# Altium PCB Dentist_camera_extender_board_pcb_2.PcbDoc
Units mm, origin at the board's own origin, x right, y up, seen from the top; angles counter-clockwise.
Board outline 33.51 x 24 mm, 2 copper layers (Top Layer, Bottom Layer); 3 components, 32 nets, 59 pads, 12 vias.
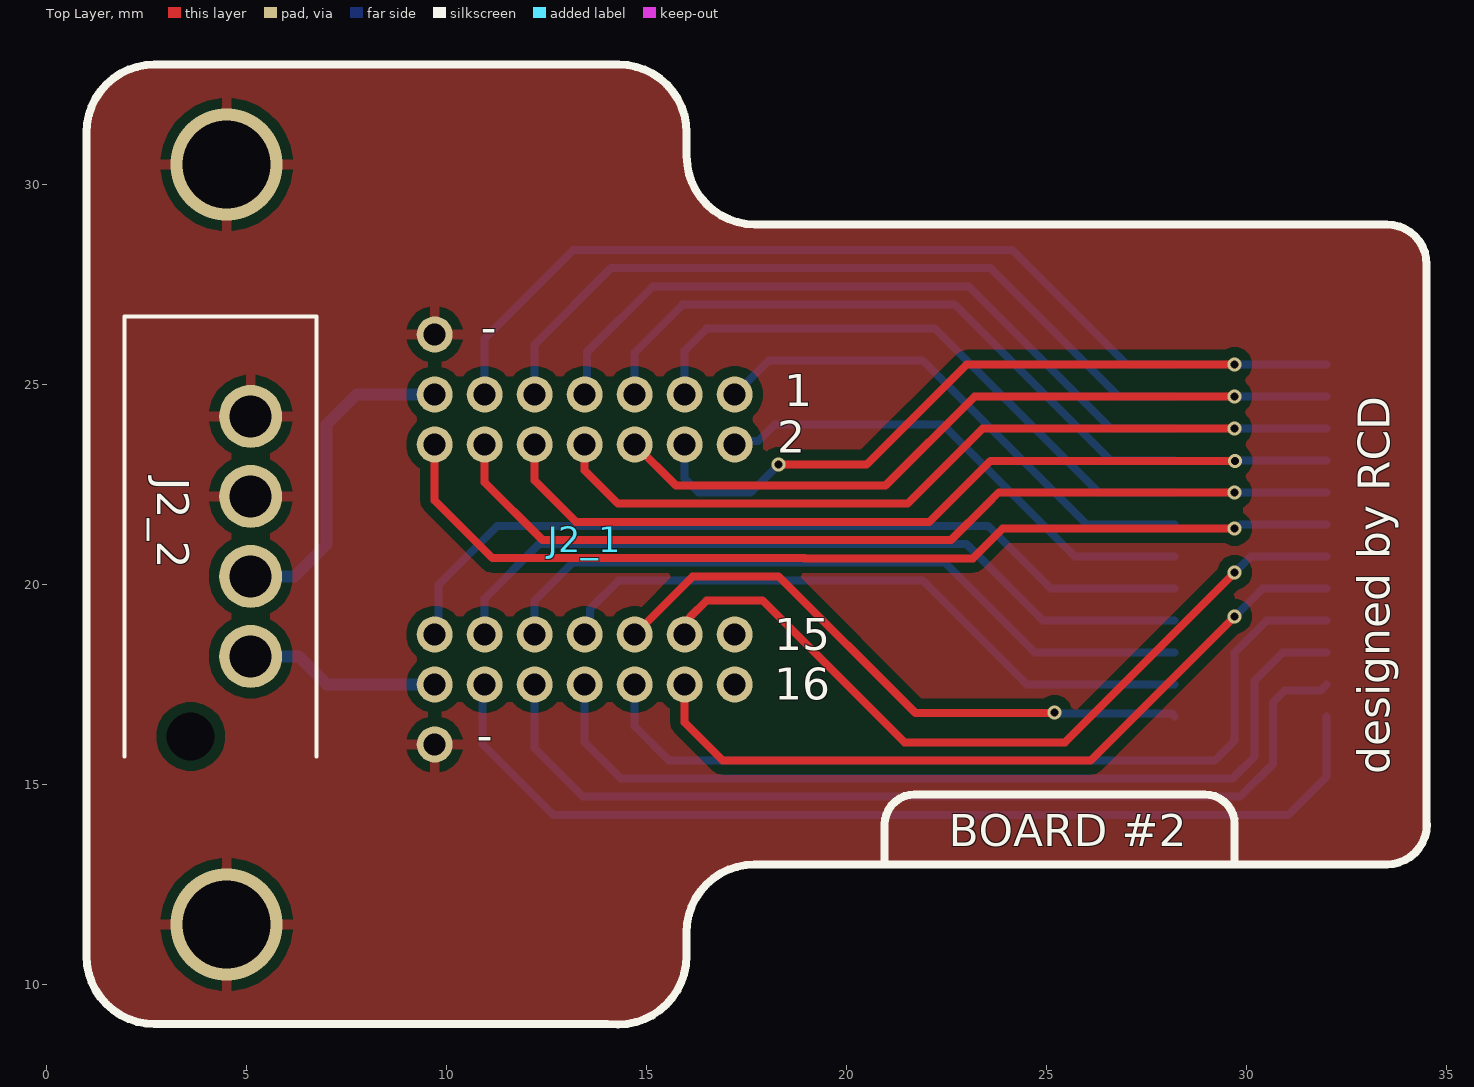
[diagram p0: Top Layer view]
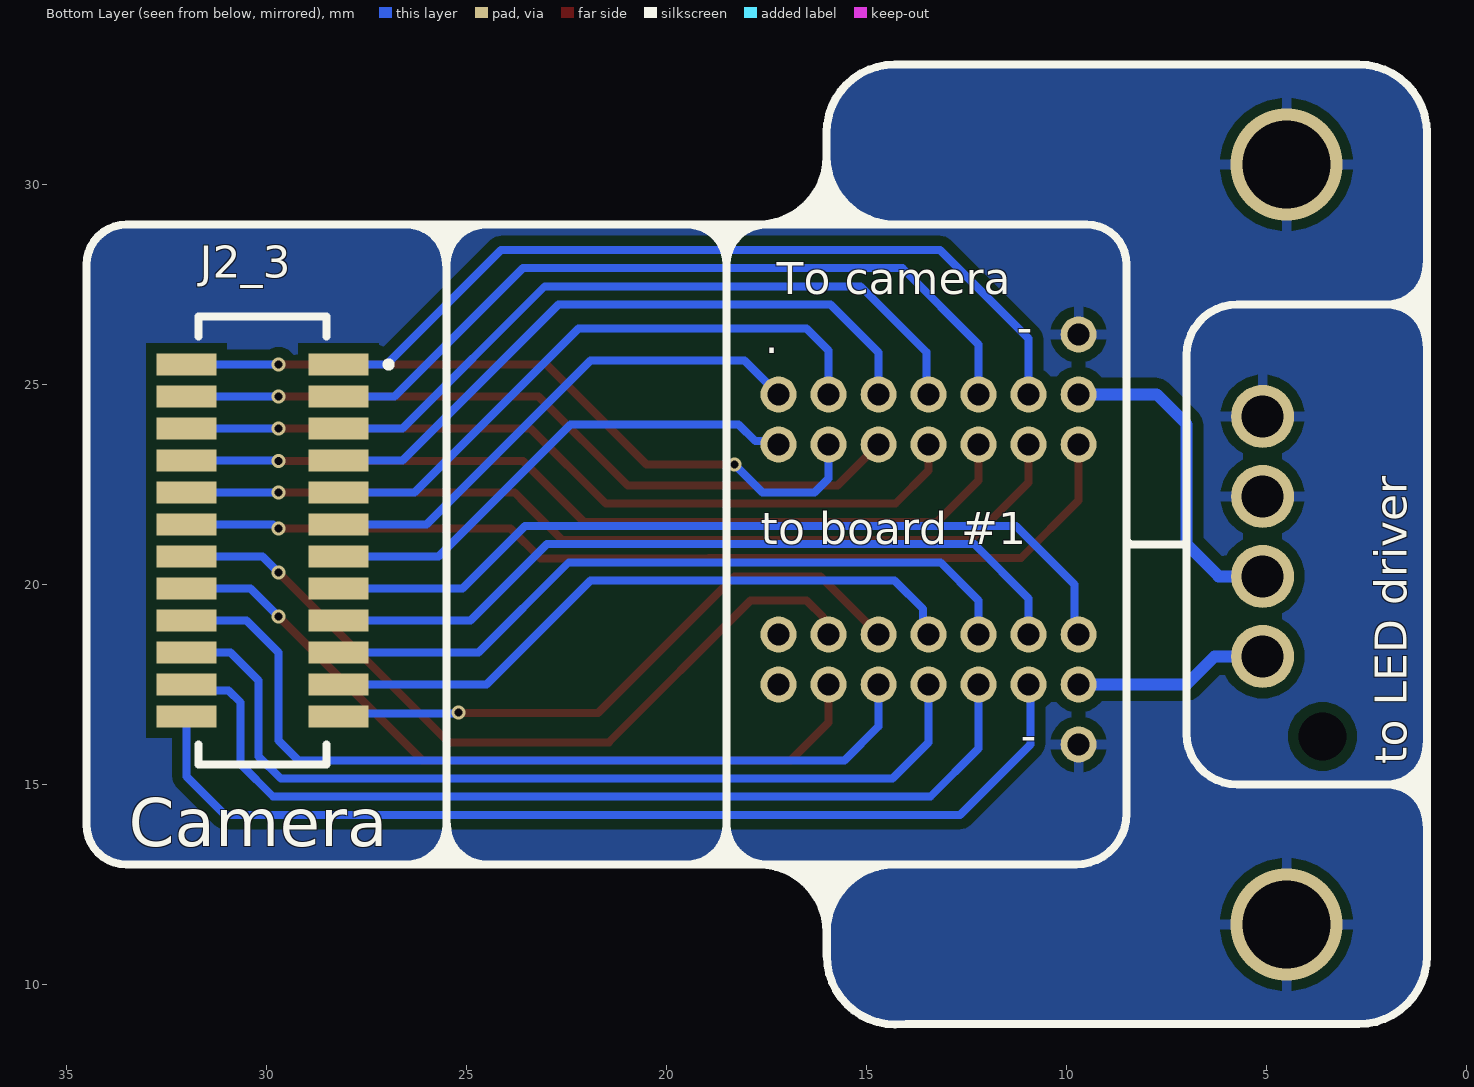
[diagram p1: Bottom Layer view, seen from below]

## Layer stack, top to bottom
Top Solder: solder mask 0.0102, Solder Resist, Dk 3.5
Top Layer: signal copper 0.0356
Dielectric 1: dielectric 0.32, FR-4, Dk 4.8
Bottom Layer: signal copper 0.0356
Bottom Solder: solder mask 0.0102, Solder Resist, Dk 3.5

## Board outline
2.7,9.007 14.002,9.007 cw(c14.002,9.005) 14.004,9.005 14.286,9 ccw(c14.286,10.707) 15.493,9.5 ccw(c14.286,10.707) 15.993,10.707 15.993,11.293 cw(c17.7,11.293) 16.493,12.5 cw(c17.7,11.293) 17.7,13 18.5,13 25.5,13 33.5,13 33.504,13.001 ccw(c33.504,14.001) 34.504,14.001 34.5,13.908 34.5,28.003 34.5,28 ccw(c33.5,28) 33.5,29 17.707,29 cw(c17.707,30.707) 16.5,29.5 cw(c17.707,30.707) 16,30.707 16,31.293 ccw(c14.293,31.293) 15.5,32.5 ccw(c14.293,31.293) 14.293,33 2.7,33 ccw(c2.7,31.293) 1.493,32.5 ccw(c2.7,31.293) 0.993,31.293 0.993,10.714 ccw(c2.7,10.714) 1.493,9.507 ccw(c2.7,10.714)

## Design rules (kind name [scope] priority, off if disabled: settings)
Clearance [All] p1: gap=0.254 ignorepadtopadclearanceinfootprint=FALSE except(0: Arc-Hole Track-Hole SMDPad-Hole THPad-Hole Via-Hole Fill-Hole Poly-Hole Region-Hole Text-Hole; 0.2: Arc-SMDPad Track-SMDPad SMDPad-SMDPad)
PolygonConnect [All] p1: connectstyle=Relief reliefconductorwidth=0.254 reliefentries=4 polygonreliefangle="90 Angle" airgapwidth=0.254
RoutingVias [All] p1: holewidth=0.2 width=0.35 viastyle="Through Hole" minholewidth=0.2 minwidth=0.35 maxholewidth=0.711 maxwidth=1.27
SolderMaskExpansion [All] p1: expansion=0.102 istentingtop=FALSE
Width [All] p1: maxlimit=2 minlimit=0.2 preferedwidth=0.2 minimp=50.000000 maximp=50.000000 favimp=50.000000
30 further rules are at their usual default settings.

## Components (designator, comment, footprint, x,y, rotation, side; value= is the part's Value field where it differs from the comment)
J2_1 "30 pin connector" 30_PIN_CONNECTOR 9.7,16 r0 top locked
J2_2 "B04B-JWPF-SK-R_LF__SN_" B04BJWPFSKRLFSN 5.1,18.2 r90 top
J2_3 "52465-2471" 524652471 30.1,21.1 r90 bottom locked

## Footprints (in the part's own frame and the unit in brackets; to place one, negate y for a bottom-side part, rotate by r counter-clockwise, add the part's x,y. Pads: shape width x height; smd on the part's side, far side on the other; paste and mask are expansions set on the pad)
30_PIN_CONNECTOR [mm]
  round 0.9 hole 0.55: 1(7.5,8.75) 2(7.5,7.5) 3(6.25,8.75) 4(6.25,7.5) 5(5,8.75) 6(5,7.5) 7(3.75,8.75) 8(3.75,7.5) 9(2.5,8.75) 10(2.5,7.5) 11(1.25,8.75) 12(1.25,7.5) 13(0,8.75) 14(0,7.5) 15(7.5,2.75) 16(7.5,1.5) 17(6.25,2.75) 18(6.25,1.5) 19(5,2.75) 20(5,1.5) 21(3.75,2.75) 22(3.75,1.5) 23(2.5,2.75) 24(2.5,1.5) 25(1.25,2.75) 26(1.25,1.5) 27(0,2.75) 28(0,1.5) 29(0,10.25) 30(0,0)
524652471 [mm]
  rect 0.55x1.5 smd: 1(4.4,-1.9) 2(3.6,-1.9) 3(2.8,-1.9) 4(2,-1.9) 5(1.2,-1.9) 6(0.4,-1.9) 7(-0.4,-1.9) 8(-1.2,-1.9) 9(-2,-1.9) 10(-2.8,-1.9) 11(-3.6,-1.9) 12(-4.4,-1.9) 13(4.4,1.9) 14(3.6,1.9) 15(2.8,1.9) 16(2,1.9) 17(1.2,1.9) 18(0.4,1.9) 19(-0.4,1.9) 20(-1.2,1.9) 21(-2,1.9) 22(-2.8,1.9) 23(-3.6,1.9) 24(-4.4,1.9)
  silkscreen extent -5.6,-3.2 5.6,1.6, body extent -5.61,-2.1 5.59,2.1, height 3.56
B04BJWPFSKRLFSN [mm]
  round 1.575 hole 1.05: 1(0,0) 2(2,0) 3(4,0) 4(6,0)
  round 0.6 hole 1.2 unplated: MH1(-2,1.5)
  silkscreen extent -2.5,-1.65 8.5,3.15, body extent -2.5,-1.65 8.5,3.15, height 16.7

## Part data
J2_2: "Connector", Manufacturer_Name="JST (JAPAN SOLDERLESS TERMINALS)", Manufacturer_Part_Number=B04B-JWPF-SK-R(LF)(SN), Datasheet Link=https://componentsearchengine.com/Datasheets/2/B04B-JWPF-SK-R(LF)(SN).pdf, Height=16.6mm
J2_3: "Connector", Manufacturer_Name=Molex, Mouser Part Number=538-52465-2471, Datasheet Link=https://www.molex.com/pdm_docs/sd/524652471_sd.pdf, Height=3.75mm, Manufacturer_Part_Number=52465-2471, Mouser Price/Stock=https://www.mouser.co.uk/ProductDetail/Molex/52465-2471?qs=oPDuosDifXEuWhdL4yjOXg%3D%3D

## Via types
v1: diameter 0.35, hole 0.2, Top Layer to Bottom Layer, tented both sides, 10 vias
v2: diameter 2.8, hole 2.2, Top Layer to Bottom Layer, 2 vias

## Nets (pads, with @x,y where several pads share a name; then routed paths per layer and width w, separated by ;. In a path a pad name is that pad's centre, name@x,y a point inside that pad or via, vN(x,y) a via of type N, cw(c..) or ccw(c..) an arc to the next point about the centre after c; other vN are vias at no path point)
GND: J2_1.29 J2_1.30 J2_2.3 J2_2.4
  other v2: 4.5,11.5 4.5,30.5
GND_SDI: 
NetD1_1: 
NetD2_1: 
NetJ1_1: J2_1.4 J2_3.13 | length 18.4
  Top Layer w0.2: v1(18.3,23) 20.5,23 23,25.5 v1(29.7,25.5)
  Bottom Layer w0.2: J2_1.4 15.95,22.65 16.3,22.3 17.6,22.3 v1(18.3,23) ; v1(29.7,25.5) J2_3.13
NetJ1_2: J2_1.11 J2_3.1 | length 20.8
  Bottom Layer w0.2: J2_1.11 10.95,26.15 13.162,28.362 24.138,28.362 27,25.5 J2_3.1
NetJ1_3: J2_1.6 J2_3.14 | length 18.6
  Top Layer w0.2: J2_1.6 15.729,22.471 20.971,22.471 23.2,24.7 v1(29.7,24.7)
  Bottom Layer w0.2: v1(29.7,24.7) J2_3.14
NetJ1_4: J2_1.9 J2_3.2 | length 19.4
  Bottom Layer w0.2: J2_1.9 12.2,26 14.108,27.908 23.592,27.908 26.8,24.7 J2_3.2
NetJ1_5: J2_1.8 J2_3.15 | length 20.3
  Top Layer w0.2: J2_1.8 13.45,22.85 14.283,22.017 21.517,22.017 23.4,23.9 v1(29.7,23.9)
  Bottom Layer w0.2: v1(29.7,23.9) J2_3.15
NetJ1_6: J2_1.7 J2_3.3 | length 17.9
  Bottom Layer w0.2: J2_1.7 13.508,24.808 13.508,25.808 15.154,27.454 23.046,27.454 26.6,23.9 J2_3.3
NetJ1_7: J2_1.10 J2_3.16 | length 21.8
  Top Layer w0.2: J2_1.10 12.2,22.6 13.237,21.563 22.063,21.563 23.589,23.089 v1(29.706,23.089)
  Bottom Layer w0.2: v1(29.706,23.089) 29.712,23.094 31.994,23.094 J2_3.16
NetJ1_8: J2_1.5 J2_3.4 | length 16.7
  Bottom Layer w0.2: J2_1.5 14.7,25.8 15.9,27 22.7,27 26.6,23.1 J2_3.4
NetJ1_9: J2_1.12 J2_3.17 | length 23.1
  Top Layer w0.2: J2_1.12 10.95,22.55 12.391,21.109 22.609,21.109 23.5,22 23.803,22.303 v1(29.698,22.303)
  Bottom Layer w0.2: v1(29.698,22.303) 29.7,22.302 J2_3.17 J2_3.17
NetJ1_10: J2_1.3 J2_3.5 | length 15.3
  Bottom Layer w0.2: J2_1.3 15.95,25.85 16.5,26.4 22.2,26.4 26.3,22.3 J2_3.5
NetJ1_11: J2_1.14 J2_3.18 | length 24.6
  Top Layer w0.2: J2_1.14 9.7,22.1 11.145,20.655 18.945,20.655 18.946,20.654 23.154,20.654 23.9,21.4 v1(29.7,21.4)
  Bottom Layer w0.2: v1(29.7,21.4) 29.741,21.4 29.841,21.5 J2_3.18
NetJ1_12: J2_1.1 J2_3.6 | length 13.1
  Bottom Layer w0.2: J2_1.1 18.05,25.6 21.9,25.6 26,21.5 J2_3.6
NetJ1_13: J2_1.17 J2_3.19 | length 20
  Top Layer w0.2: J2_1.17 16.084,18.884 16.084,19.184 16.5,19.6 17.9,19.6 21.446,16.054 25.454,16.054 v1(29.7,20.3)
  Bottom Layer w0.2: v1(29.7,20.3) 30.1,20.7 J2_3.19
NetJ1_14: J2_1.2 J2_3.7 | length 12.6
  Bottom Layer w0.2: J2_1.2 17.28,23.58 17.78,23.58 18.2,24 22.4,24 25.7,20.7 J2_3.7
NetJ1_15: J2_1.18 J2_3.20 | length 19.2
  Top Layer w0.2: J2_1.18 15.95,16.55 16.9,15.6 26.1,15.6 v1(29.7,19.2)
  Bottom Layer w0.2: v1(29.7,19.2) 30.4,19.9 J2_3.20
NetJ1_16: J2_1.27 J2_3.8 | length 20.9
  Bottom Layer w0.2: J2_1.27 9.8,18.85 9.8,20 11.262,21.462 23.538,21.462 25.1,19.9 J2_3.8
NetJ1_17: J2_1.20 J2_3.21 | length 21.4
  Bottom Layer w0.2: J2_1.20 14.7,16.454 15.554,15.6 29.2,15.6 29.7,16.1 29.7,18.3 30.5,19.1 J2_3.21
NetJ1_18: J2_1.25 J2_3.9 | length 19.5
  Bottom Layer w0.2: J2_1.25 10.95,19.65 12.308,21.008 22.992,21.008 24.9,19.1 J2_3.9
NetJ1_19: J2_1.22 J2_3.22 | length 22.8
  Bottom Layer w0.2: J2_1.22 13.45,16.05 14.354,15.146 29.646,15.146 30.2,15.7 30.2,17.6 30.9,18.3 J2_3.22
NetJ1_20: J2_1.23 J2_3.10 | length 18.2
  Bottom Layer w0.2: J2_1.23 12.2,19.6 13.154,20.554 22.446,20.554 24.7,18.3 J2_3.10
NetJ1_21: J2_1.24 J2_3.23 | length 24
  Bottom Layer w0.2: J2_1.24 12.2,15.9 13.408,14.692 29.834,14.692 30.654,15.512 30.654,17.054 30.95,17.35 31.85,17.35 J2_3.23
NetJ1_22: J2_1.21 J2_3.11 | length 16.7
  Bottom Layer w0.2: J2_1.21 13.584,18.884 13.584,19.384 14.3,20.1 21.9,20.1 24.5,17.5 J2_3.11
NetJ1_23: J2_1.26 J2_3.24 | length 25.2
  Bottom Layer w0.2: J2_1.26 10.9,17.45 10.9,16 12.662,14.238 31.038,14.238 32,15.2 J2_3.24
NetJ1_24: J2_1.19 J2_3.12 | length 15.6
  Top Layer w0.2: J2_1.19 16.15,20.2 18.3,20.2 21.717,16.783 25.183,16.783 v1(25.2,16.8)
  Bottom Layer w0.2: v1(25.2,16.8) 25.229,16.771 28.129,16.771 J2_3.12
NetJ2_1_13: J2_1.13 J2_2.2 | length 8.2
  Bottom Layer w0.3: J2_2.2 6.2,20.2 7,21 7,24 7.75,24.75 J2_1.13
NetJ2_1_28: J2_1.28 J2_2.1 | length 4.9
  Bottom Layer w0.3: J2_2.1 6.3,18.2 7,17.5 J2_1.28
NetJ3_1_2: 
VCC_SDI: 
pads on no net: J2_1.15 J2_1.16 J2_2.MH1

## Polygon pours and split planes (outlines as drawn)
GND on Top Layer "GND_L01_P006" (solid, remove dead copper, pour order 6): 2.7,9.007 14.002,9.007 cw(c14.002,9.005) 14.004,9.005 14.286,9 ccw(c14.286,10.707) 15.493,9.5 ccw(c14.286,10.707) 15.993,10.707 15.993,11.293 cw(c17.7,11.293) 16.493,12.5 cw(c17.7,11.293) 17.7,13 18.5,13 25.5,13 33.5,13 33.504,13.001 ccw(c33.504,14.001) 34.504,14.001 34.5,13.908 34.5,28.003 34.5,28 ccw(c33.5,28) 33.5,29 17.707,29 cw(c17.707,30.707) 16.5,29.5 cw(c17.707,30.707) 16,30.707 16,31.293 ccw(c14.293,31.293) 15.5,32.5 ccw(c14.293,31.293) 14.293,33 2.7,33 ccw(c2.7,31.293) 1.493,32.5 ccw(c2.7,31.293) 0.993,31.293 0.993,10.714 ccw(c2.7,10.714) 1.493,9.507 ccw(c2.7,10.714)
GND on Bottom Layer "GND_L01_P007" (solid, remove dead copper, pour order 7): 2.7,9.007 14.002,9.007 cw(c14.002,9.005) 14.004,9.005 14.286,9 ccw(c14.286,10.707) 15.493,9.5 ccw(c14.286,10.707) 15.993,10.707 15.993,11.293 cw(c17.7,11.293) 16.493,12.5 cw(c17.7,11.293) 17.7,13 18.5,13 25.5,13 33.5,13 33.504,13.001 ccw(c33.504,14.001) 34.504,14.001 34.5,13.908 34.5,28.003 34.5,28 ccw(c33.5,28) 33.5,29 17.707,29 cw(c17.707,30.707) 16.5,29.5 cw(c17.707,30.707) 16,30.707 16,31.293 ccw(c14.293,31.293) 15.5,32.5 ccw(c14.293,31.293) 14.293,33 2.7,33 ccw(c2.7,31.293) 1.493,32.5 ccw(c2.7,31.293) 0.993,31.293 0.993,10.714 ccw(c2.7,10.714) 1.493,9.507 ccw(c2.7,10.714)

## Silkscreen, mask and mechanical layers (free items; w line width, h text height)
Top Overlay:
  lines w0.2: 20.95,13 20.95,14 cw(c21.7,14) 21.7,14.75 28.95,14.75 cw(c28.95,14) 29.7,14 29.7,13 ; 33.504,13.001 ccw(c33.504,14.001) 34.504,14.001 ; 34.5,13.908 34.5,28.003 ; 34.5,28 ccw(c33.5,28) 33.5,29 17.707,29 ; 0.993,10.714 ccw(c2.7,10.714) 1.493,9.507 ; 0.993,10.714 ccw(c2.7,10.714) 1.493,9.507 ; 0.993,10.714 0.993,31.293 ; 0.993,10.714 0.993,31.293 ; 0.993,31.293 cw(c2.7,31.293) 1.493,32.5 ; 0.993,31.293 cw(c2.7,31.293) 1.493,32.5 ; 1.493,9.507 ccw(c2.7,10.714) 2.7,9.007 ; 1.493,9.507 ccw(c2.7,10.714) 2.7,9.007 ; 1.493,32.5 cw(c2.7,31.293) 2.7,33 ; 1.493,32.5 cw(c2.7,31.293) 2.7,33 ; 2.7,9.007 14.002,9.007 ; 2.7,9.007 14.002,9.007 ; 2.7,33 14,33 ; 2.7,33 14,33 ; 14,33 14.293,33 ; 14,33 14.293,33 ; 14.002,9.007 cw(c14.002,9.005) 14.004,9.005 ; 14.002,9.007 cw(c14.002,9.005) 14.004,9.005 ; 14.004,9.005 14.286,9 ; 14.004,9.005 14.286,9 ; 14.286,9 ccw(c14.286,10.707) 15.493,9.5 ; 14.286,9 ccw(c14.286,10.707) 15.493,9.5 ; 14.293,33 cw(c14.293,31.293) 15.5,32.5 ; 14.293,33 cw(c14.293,31.293) 15.5,32.5 ; 15.493,9.5 ccw(c14.286,10.707) 15.993,10.707 ; 15.493,9.5 ccw(c14.286,10.707) 15.993,10.707 ; 15.5,32.5 cw(c14.293,31.293) 16,31.293 ; 15.5,32.5 cw(c14.293,31.293) 16,31.293 ; 15.993,10.707 15.993,11.293 ; 15.993,10.707 15.993,11.293 ; 15.993,11.293 cw(c17.7,11.293) 16.493,12.5 ; 15.993,11.293 cw(c17.7,11.293) 16.493,12.5 ; 16,30.707 ccw(c17.707,30.707) 16.5,29.5 ; 16,30.707 ccw(c17.707,30.707) 16.5,29.5 ; 16,30.707 16,31.293 ; 16,30.707 16,31.293 ; 16.493,12.5 cw(c17.7,11.293) 17.7,13 ; 16.493,12.5 cw(c17.7,11.293) 17.7,13 ; 16.5,29.5 ccw(c17.707,30.707) 17.707,29 ; 16.5,29.5 ccw(c17.707,30.707) 17.707,29 ; 17.7,13 18.27,13 ; 17.7,13 18.27,13 ; 18.27,13 18.5,13 ; 18.27,13 18.5,13 ; 18.5,13 23.25,13 ; 18.5,13 23.25,13 ; 23.25,13 25.5,13 ; 23.25,13 25.5,13 ; 25.5,13 33.5,13 25.5,13
  text "-" at 11.246,26.646 h0.8 r180
  text "1" at 18.433,24.46 h0.8
  text "2" at 18.267,23.288 h0.8
  text "15" at 18.19,18.355 h0.8
  text "16" at 18.19,17.116 h0.8
  text "-" at 11.146,16.446 h0.8 r180
  text "-" at 11.146,16.446 h0.8 r180
  text "designed by RCD" at 33.579,15.254 h0.8 r90
  text "BOARD #2" at 22.554,13.454 h0.8
Bottom Overlay:
  drawing of 179 lines, arcs and shapes, not listed
  text "To camera" at 17.246,27.254 h0.8
  text "-" at 11.246,26.646 h0.8 r180
  text "to board #1" at 17.646,21.004 h0.8
  text "-" at 11.146,16.446 h0.8 r180
  text "to LED driver" at 1.5,15.5 h0.8 r270
  text "Camera" at 33.446,13.454 h1.2